# EAGLE board controller (EAGLE 9.6.2)

Size 100 x 80 mm. Coordinates in mm from the lower left corner, seen from the top.
Outline: 0,0 100,0 100,80 0,80 0,0
Copper layers (1*16): Top 0.035mm / dielectric 1.5mm / Bottom 0.035mm
Design rules "default": minimum track width 6mil, minimum drill 0.35mm, track to track 6mil, track to pad 6mil, pad to pad 6mil, via to via 6mil, smd to smd 6mil, copper to edge 40mil, drill to drill 6mil, minimum pad ring 10mil, minimum via ring 8mil, stop-mask expansion 4mil, vias tented up to drill 0mil, thermal gap 10mil

## Footprints (pad centres in the part's own frame; a part is rotated, then mirrored left to right if it is on the bottom)
SO14 = smd 0.66 x 2.032: 1 -3.81,-3.073; 2 -2.54,-3.073; 3 -1.27,-3.073; 4 0,-3.073; 5 1.27,-3.073; 6 2.54,-3.073; 7 3.81,-3.073; 8 3.81,3.073; 9 2.54,3.073; 10 1.27,3.073; 11 0,3.073; 12 -1.27,3.073; 13 -2.54,3.073; 14 -3.81,3.073
SO16 = smd 0.66 x 2.032: 1 -4.445,-3.073; 2 -3.175,-3.073; 3 -1.905,-3.073; 4 -0.635,-3.073; 5 0.635,-3.073; 6 1.905,-3.073; 7 3.175,-3.073; 8 4.445,-3.073; 9 4.445,3.073; 10 3.175,3.073; 11 1.905,3.073; 12 0.635,3.073; 13 -0.635,3.073; 14 -1.905,3.073; 15 -3.175,3.073; 16 -4.445,3.073
1X03/90 = drill 1.016 long: 1 -2.54,-3.81; 2 0,-3.81; 3 2.54,-3.81
86SMX = smd 2.286 x 2.184: 1 -5.08,-2.286; 4 -5.08,2.286 | smd 3.556 x 2.184: 2 4.318,-2.286; 3 4.318,2.286

## Placement (x,y rotation side)
IC2  74HC04D  [SO14]  -19.05,36.83 0 top  (outside the outline)
IC3  74HC590D  [SO16]  -30.48,5.08 0 top  (outside the outline)
IC4  74HC151D  [SO16]  -19.05,19.05 0 top  (outside the outline)
IC5  74HC151D  [SO16]  -33.02,19.05 0 top  (outside the outline)
IC6  74HC151D  [SO16]  -19.05,27.94 0 top  (outside the outline)
IC7  74HC151D  [SO16]  -33.02,27.94 0 top  (outside the outline)
IC8  74HC08D  [SO14]  -31.75,36.83 0 top  (outside the outline)
JP1  [1X03/90]  -17.78,6.35 0 top  (outside the outline)
Q1  [86SMX]  -20.32,45.72 0 top  (outside the outline)

## Library data of the parts
IC2-IC8 = 74xx-eu
JP1 = pinhead
Q1 = crystal; OC_FARNELL: 6344860; OC_NEWARK: unknown

## Nets
+3V3: IC3.9 IC3.10 IC3.12
GND: IC2.7 IC3.8 IC4.8 IC5.8 IC6.8 IC7.8 IC8.7
VCC: IC2.14 IC3.16 IC4.16 IC5.16 IC6.16 IC7.16 IC8.14

## Tracks (layer width: path | path; a pad name or v marks a point on that pad's centre or on a via)
+3V3  (2 unrouted)
GND  (6 unrouted)
VCC  (6 unrouted)